# Altium PCB УШЯИ.467444.130_R1.PcbDoc (part 3 of 4)
Units mm, origin at the board's own origin, x right, y up, seen from the top; angles counter-clockwise.
Board outline 280 x 190 mm, 6 copper layers (Top, GND, INT1, INT2, +3.3VB, POWER, Bottom), stack 1.422 mm thick; 240 components, 189 nets, 1128 pads, 331 vias.
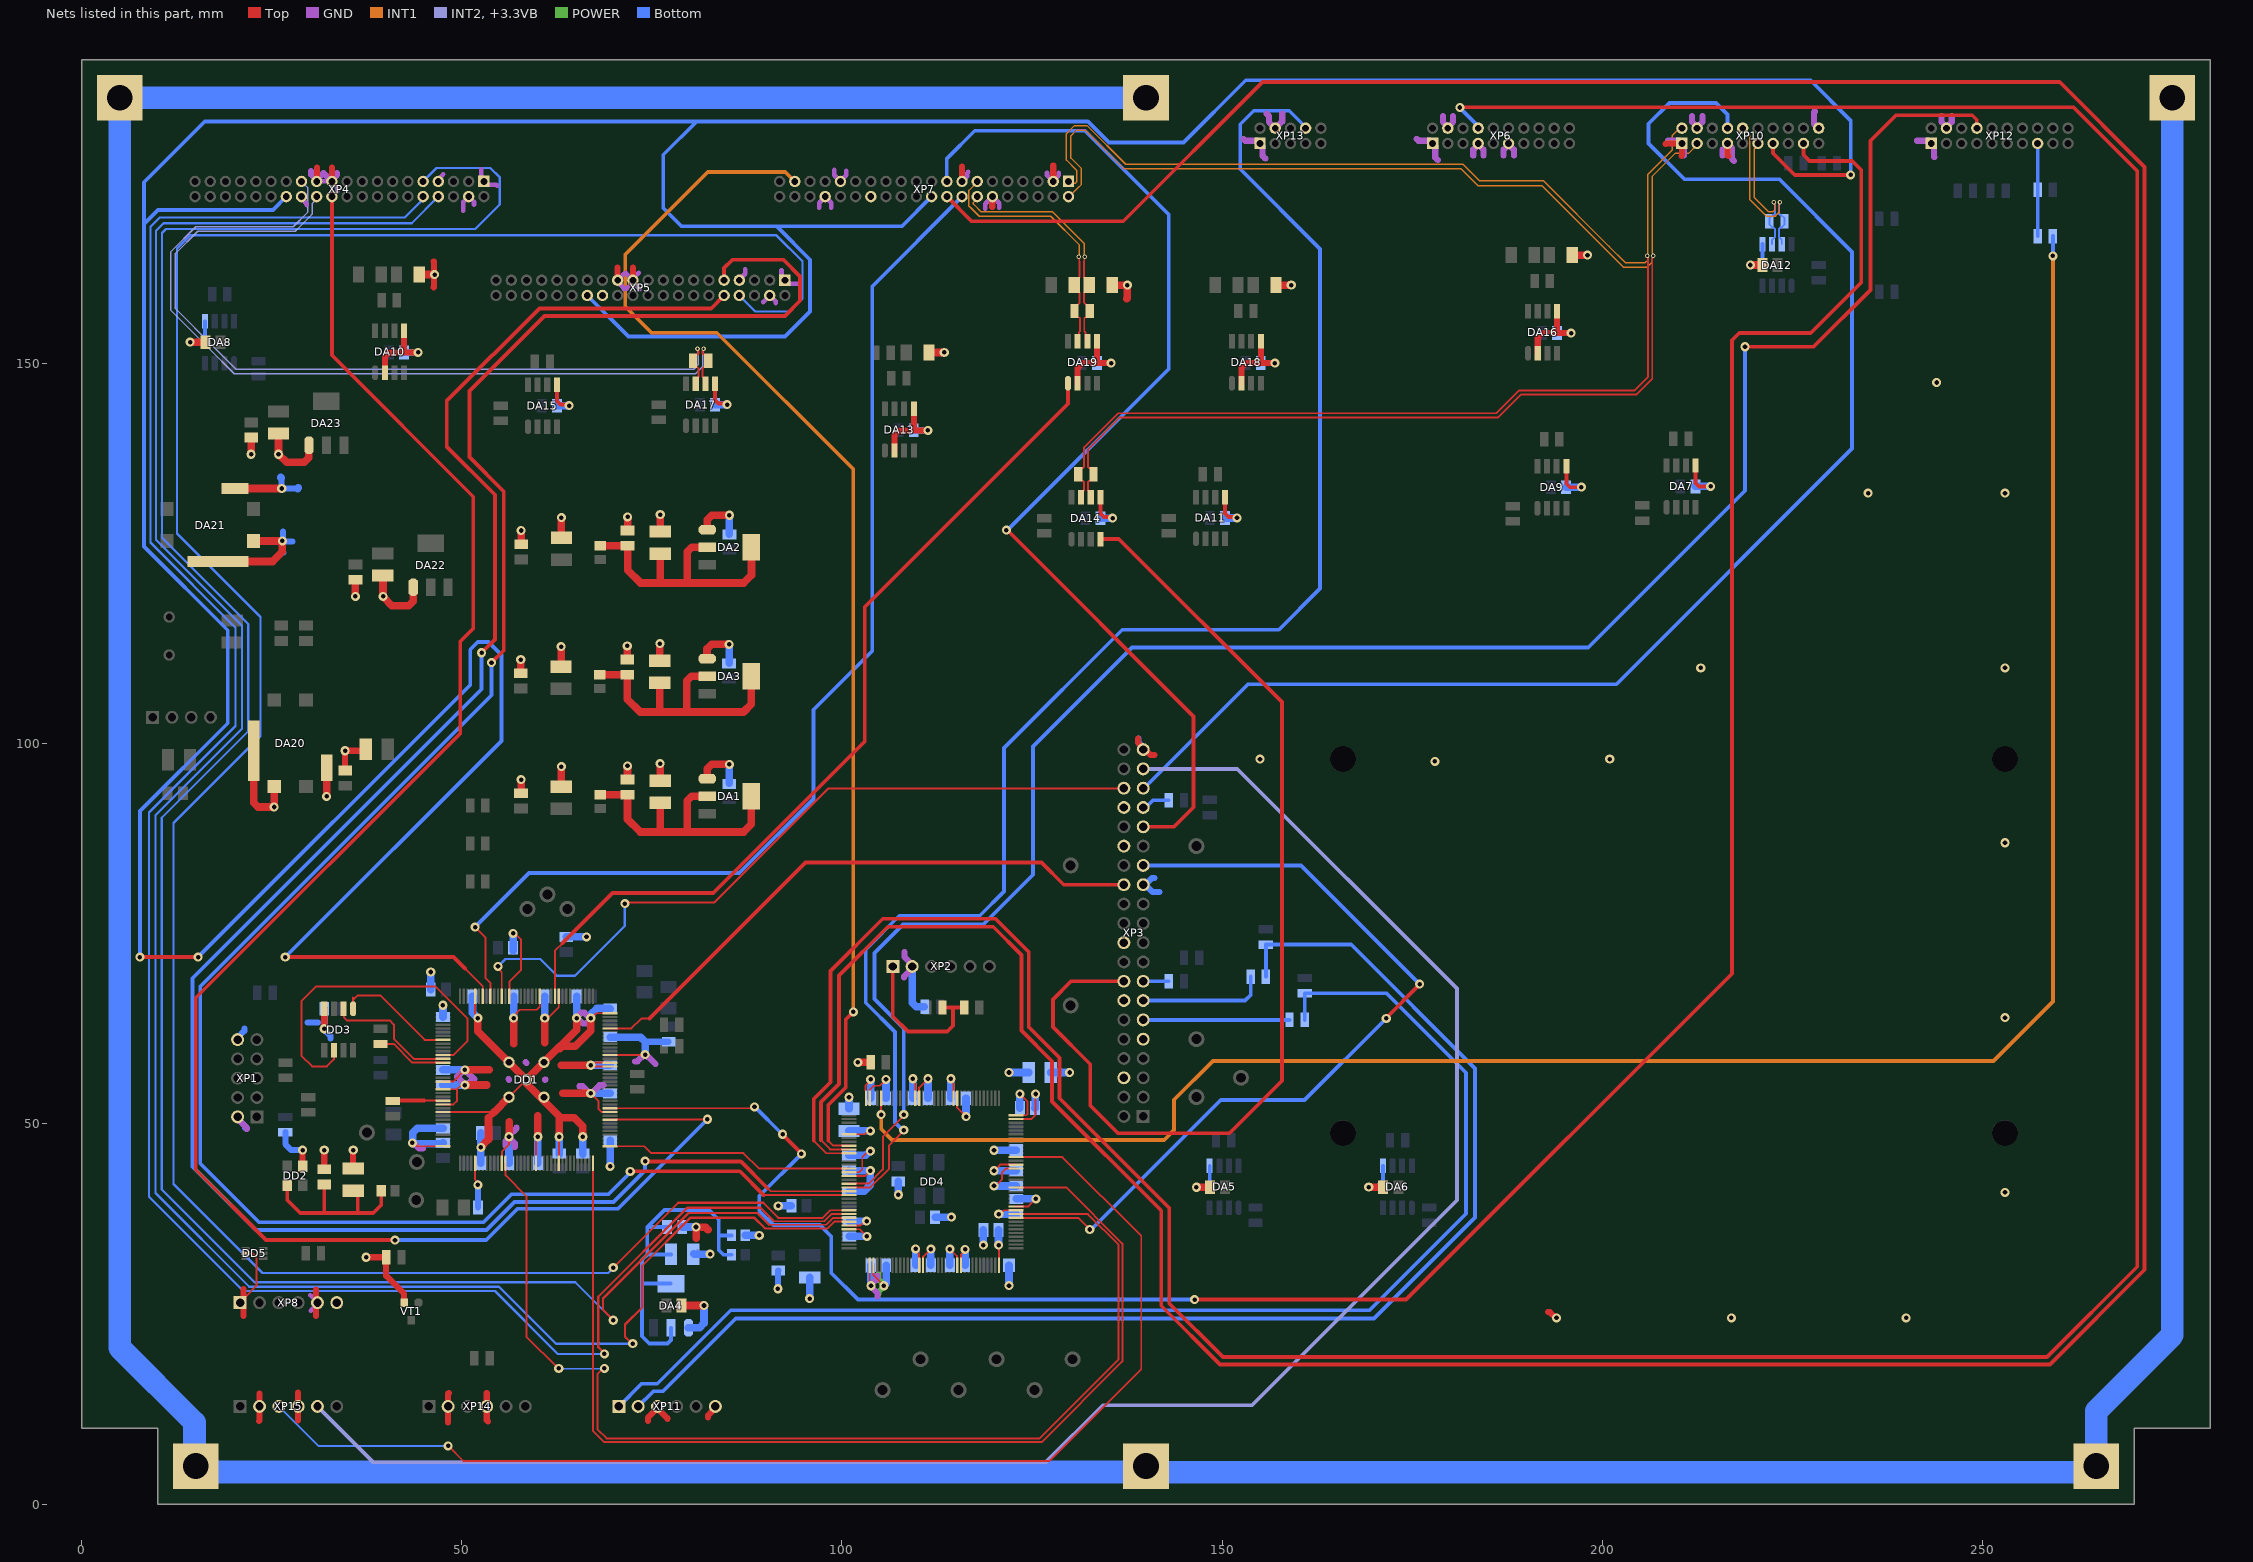
[diagram p7: the nets of this part, all layers, seen from the top]

## Via types
v1: diameter 1.2, hole 0.6, Top to Bottom, tented both sides, 289 vias
v2: diameter 0.6, hole 0.3, Top to Bottom, tented both sides, 42 vias

## Nets (pads, with @x,y where several pads share a name; then routed paths per layer and width w, separated by ;. In a path a pad name is that pad's centre, name@x,y a point inside that pad or via, vN(x,y) a via of type N, cw(c..) or ccw(c..) an arc to the next point about the centre after c; other vN are vias at no path point) (continued)
DAT_DDAC_n: DA14.7 R39.1 XP7.1 XP10.2 | length 213.7
  Top w0.25: DA14.7@131.465,132.45 131.465,133 131.825,133.36 131.825,133.9 131.825,134.479 131.679,134.625 131.525,134.625 131.1,135.05 R39.1@131.1,135.45 131.1,135.85 131.525,136.275 131.679,136.275 131.825,136.421 131.825,138.978 136.347,143.5 186.1,143.5 189.1,146.5 204.272,146.5 206.05,148.278 206.05,163.904 205.992,163.962 205.992,164.158 v2(205.925,164.225)
  INT1 w0.2: XP7.1@129.8,174 130.019,173.781 130.733,173.781 130.9,173.949 130.9,175.441 129.525,176.816 129.525,180.266 130.609,181.35 132.243,181.35 137.343,176.25 181.71,176.25 183.903,174.057 192.318,174.057 192.494,173.881 200.926,165.449 203.075,163.3 205.651,163.3 206.025,163.674 206.025,163.908 206.002,163.931 206.002,164.148 v2(205.925,164.225) 206.002,164.302 206.002,164.519 206.025,164.542 206.025,174.949 209.225,178.149 209.225,180.025 210.2,181 XP10.2@210.5,181
DAT_DDAC_p: DA14.6 R39.2 XP7.2 XP10.3 | length 214.6
  Top w0.25: DA14.6@132.735,132.45 132.735,133 132.375,133.36 132.375,134.127 132.375,134.479 132.521,134.625 132.675,134.625 133.1,135.05 R39.2@133.1,135.45 133.1,135.85 132.675,136.275 132.521,136.275 132.375,136.421 132.375,138.75 136.575,142.95 186.328,142.95 189.328,145.95 204.5,145.95 206.6,148.05 206.6,163.904 206.658,163.962 206.658,164.158 v2(206.725,164.225)
  INT1 w0.2: XP7.2@129.8,172 129.9,172 131,173.1 131.5,173.6 131.5,175.689 130.125,177.064 130.125,180.018 130.857,180.75 131.994,180.75 137.094,175.65 181.462,175.65 183.654,173.457 192.069,173.457 202.826,162.7 205.9,162.7 206.625,163.425 206.625,163.908 206.648,163.931 206.648,164.148 v2(206.725,164.225) 206.648,164.302 206.648,164.519 206.625,164.542 206.625,174.701 209.599,177.675 211.35,177.675 212.5,178.825 XP10.3@212.5,179
DAT_RG: DD1.49 DD4.82 | length 147.4
  Top w0.25: DD1.49@55.75,44.837 55.75,43.25 58.5,40.5 58.5,22.025 62.675,17.85 v1(62.75,17.85) ; v1(68.75,17.85) 68.575,17.85 67.825,17.1 67.825,9.868 69.043,8.65 126,8.65 136.4,19.05 136.4,34.1 132.35,38.15 DD4.82@122.9,38.15
  Bottom w0.25: 63.35,17.8 68.7,17.8 v1(68.75,17.85)
DATAO: DD1.13 DD3.2 | length 17.5
  Top w0.25: DD3.2@34.435,65.175 34.499,65.111 34.499,63.996 34.87,63.625 40.5,63.625 41.05,63.075 41.05,61.225 43.7,58.575 45.95,58.575 DD1.13@47.512,58.575
DCLK: DD1.12 DD3.6 | length 44.6
  Top w0.25: DD3.6@33.165,59.375 33.165,58.49 32.25,57.575 30.31,57.575 28.9,58.985 28.9,66.175 30.825,68.1 46.525,68.1 50.75,63.875 50.75,60.975 48.85,59.075 DD1.12@47.512,59.075
DOOR: R67.2 R68.1 XP12.15 | length 12.2
  Bottom w0.5: R68.1@257.3,166.8 R67.2@257.3,172.9 257.3,173 XP12.15@257.3,179
DOOR_R: DD4.140 R68.2 | length 269.4
  Top w0.25: v1(105.162,51.225) DD4.140@105.162,53.388
  INT1 w0.5: v1(105.162,51.225) 105.162,49.338 106.6,47.9 142.4,47.9 143.7,49.2 143.7,53.2 148.8,58.3 251.5,58.3 259.3,66.1 v1(259.3,164.2)
  Bottom w0.5: v1(259.3,164.2) R68.2@259.3,166.8
DT_DDAC: DA14.4 XP3.16 | length 138.4
  Top w0.5: DA14.4@134.005,126.95 136.425,126.95 157.875,105.5 157.875,55.695 150.972,48.792 136.328,48.792 132.675,52.445 132.675,57.87 127.775,62.77 127.775,66.4 130.153,68.778 XP3.16@137.09,68.778
DVCST: C45.2 C46.2 C47.2 C48.2 C49.2 C50.2 C51.2 C52.2 C53.2 C54.2 C55.2 C56.2 C62.+ C95.- DD4.6 DD4.17 DD4.30 DD4.39 DD4.52 DD4.62 DD4.72 DD4.84 DD4.95 DD4.108 DD4.121 DD4.131 DD4.144 L10.2 R12.1 R13.1 R14.1 XP2.1 | length 103.9
  Top w0.25: DD4.30@100.924,36.65 102.446,36.65 103.021,37.225 v1(103.25,37.225) ; DD4.17@100.924,43.15 103.025,43.15 v1(103.75,43.875) ; DD4.6@100.924,48.65 103.03,48.65 103.48,49.1 v1(103.737,49.1) ; DD4.144@103.162,53.388 103.137,53.413 103.137,54.386 103.125,54.398 103.125,55.072 103.775,55.722 v1(103.775,55.875) ; DD4.39@104.162,31.412 104.162,30.088 v1@105.703,28.547 ; v1(109.325,55.95) 109.325,55.693 109.662,55.356 DD4.131@109.662,53.388 ; DD4.52@110.662,31.412 110.687,31.437 110.687,32.547 111.001,32.861 111.011,32.861 v1(111.7,33.55) ; v1(114.325,55.95) 114.325,55.693 114.662,55.356 DD4.121@114.662,53.388 ; DD4.62@115.662,31.412 115.662,32.787 116.2,33.325 v1(116.2,33.5) ; v1(120,43.85) 120.8,44.65 DD4.95@122.9,44.65 ; v1(120.6,34.075) 120.637,34.038 120.637,31.437 DD4.72@120.662,31.412 ; DD4.84@122.9,39.15 124.525,39.15 v1(125.525,40.15) ; DD4.108@122.9,51.15 124.279,51.15 124.425,51.296 124.425,52.925 v1(123.4,53.95)
  Top w0.5: XP2.1@106.695,70.725 106.695,64.13 108.675,62.15 113.85,62.15 114.625,62.925 114.625,65.325 ; R13.1@113.225,65.325 114.625,65.325 ; R12.1@115.6,65.325 114.625,65.325
  POWER w0.8: 104.81,27.639 104.81,27.901 105.525,28.617 v1(105.525,28.725) 105.525,28.833 104.81,29.549 104.81,30.18
  Bottom w1: L10.2@87.275,35.35 v1(89.125,35.35) ; C95.-@100.925,49.1 v1(103.737,49.1) ; C56.2@100.944,43.894 100.962,43.875 v1(103.75,43.875) 103.75,41.975 102.95,41.175 R14.1@100.95,41.175 ; C55.2@100.95,37.225 v1(103.25,37.225) ; v1(103.775,55.875) 103.788,55.862 103.788,53.387 C45.2@103.8,53.375 ; v1(105.525,28.725) 105.825,29.025 C54.2@105.825,31.425 ; C46.2@109.325,53.375 v1(109.325,55.95) ; C53.2@111.7,31.425 v1(111.7,33.55) ; C47.2@114.325,53.375 v1(114.325,55.95) ; C52.2@116.2,31.425 v1(116.2,33.5) ; v1(120,43.85) 120.012,43.838 122.913,43.838 C49.2@122.925,43.825 ; v1(120.6,34.075) C51.2@120.6,36.05 ; v1(121.975,56.775) C62.+@124.575,56.775 ; C50.2@122.925,40.15 v1(125.525,40.15) ; C48.2@123.4,52.1 v1(123.4,53.95)
EA: R51.2 R53.2 XP11.1 | length 169.6
  Bottom w0.5: XP11.1@70.65,12.85 73.625,15.825 75.695,15.825 85.37,25.5 169.4,25.5 182.1,38.2 182.1,56.75 171.65,67.2 R51.2@160.875,67.2 R53.2@160.875,63.696
EB: R52.2 R54.2 XP11.2 | length 178.5
  Bottom w0.5: XP11.2@73.19,12.85 75.19,14.85 76.475,14.85 86.025,24.4 169.997,24.4 183.3,37.703 183.3,57.3 167,73.6 R52.2@155.775,73.6 R54.2@155.775,69.4
EIMP: DD1.83 XP10.17 | length 319.3
  Top w0.25: DD1.83@69.488,52.075 88.325,52.075 v1(88.5,52.25)
  Top w0.5: v1(92.2,48.65) 92.2,48.6 94.675,46.125 v1(94.675,46.075) ; v1(146.4,26.9) 174.225,26.9 217.1,69.775 217.1,153.1 218.05,154.05 227.45,154.05 234.1,160.7 234.1,175.5 232.9,176.7 227.3,176.7 226.5,177.5 XP10.17@226.5,179
  Bottom w0.5: v1(88.5,52.25) 88.55,52.25 92.15,48.65 v1(92.2,48.65) ; v1(94.675,46.075) 89.125,40.525 89.125,38.575 91,36.7 97.1,36.7 98.6,35.2 98.6,30.4 102.1,26.9 v1(146.4,26.9)
EN_DDA1: XP3.31 XP7.17 | length 143.2
  Top w0.5: v1(121.625,128.125) 121.75,128.125 146.25,103.625 146.25,91.675 143.673,89.098 XP3.31@139.63,89.098
  Bottom w0.5: XP7.17@113.8,174 113.8,177 117.467,180.667 131.963,180.667 143,169.63 143,149.325 121.8,128.125 v1(121.625,128.125)
EN_DDA2: XP3.35 XP10.8 | length 186.8
  Bottom w0.5: XP3.35@139.63,94.178 139.728,94.178 153.4,107.85 153.9,107.85 201.875,107.85 232.875,138.85 232.875,164.725 223.325,174.275 210.825,174.275 206.125,178.975 206.125,181.575 208.875,184.325 214.975,184.325 216.5,182.8 XP10.8@216.5,181
ENB_PC: DD4.81 XP3.27 | length 110
  Top w0.25: DD4.81@122.9,37.65 131.1,37.65 132.6,36.15 v1(132.6,36.125)
  Top w0.5: v1(171.6,63.9) 171.6,63.95 176,68.35 v1(176,68.4)
  Bottom w0.5: v1(132.6,36.125) 132.789,36.125 133.139,36.475 133.15,36.475 149.825,53.15 160.85,53.15 v1(171.6,63.9) ; XP3.27@139.63,84.018 160.382,84.018 v1(176,68.4)
END1B: DD4.29 XP4.8 | length 288.4
  Top w0.25: 89.875,36.275 98.125,36.275 99,37.15 DD4.29@100.924,37.15
  Top w0.3: v1(72.475,21.1) 72.4,21.1 71.475,22.025 71.475,23.625 73.725,25.875 73.725,31.35 80.025,37.65 88.5,37.65 89.875,36.275
  Bottom w0.3: XP4.8@46.9,172 43.4,168.5 10.75,168.5 9.75,167.5 9.75,126.863 21.075,115.538 21.075,101.998 9.7,90.623 9.7,40.925 22.025,28.6 54.872,28.6 62.372,21.1 v1(72.475,21.1)
END1P: DD4.26 XP5.8 | length 330.3
  Top w0.25: 91.65,37.675 91.675,37.65 97.45,37.65 98.45,38.65 DD4.26@100.924,38.65
  Top w0.3: v1(69.914,31.1) 78.464,39.65 89.65,39.65 91.625,37.675 91.65,37.675
  Bottom w0.3: v1(69.914,31.1) 69.914,31.064 69.25,30.4 23.776,30.4 12.075,42.101 12.075,89.614 23.5,101.039 23.5,116.707 12.525,127.682 12.525,165.175 14.25,166.9 91.4,166.9 94.8,163.5 94.8,158.6 93.1,156.9 88.6,156.9 XP5.8@86.5,159
END2B: DD4.28 XP4.9 | length 304.6
  Top w0.25: 90.4,36.75 97.95,36.75 98.85,37.65 DD4.28@100.924,37.65
  Top w0.3: v1@70.033,24.092 68.575,25.55 68.575,27.05 79.825,38.3 88.85,38.3 90.4,36.75
  Bottom w0.3: XP4.9@44.9,174 46.65,175.75 53.75,175.75 55,174.5 55,171 51.75,167.75 11.075,167.75 10.55,167.225 10.55,127.129 21.9,115.779 21.9,101.656 10.525,90.281 10.525,41.375 22.725,29.175 64.914,29.175 v1(69.914,24.175) ; v1@69.722,24.003 v1@70.021,23.704
END2P: DD4.22 XP5.9 | length 277.3
  Top w0.25: 89.693,40.65 DD4.22@100.924,40.65
  Top w0.5: v1(53.9,110.7) 55.5,112.3 55.5,133.225 51,137.725 51,146.438 60.862,156.3 92.5,156.3 94.5,158.3 94.5,161.5 92.3,163.7 85.6,163.7 84.5,162.6 XP5.9@84.5,161 ; v1(72.15,43.775) 86.568,43.775 89.693,40.65
  Bottom w0.5: v1(53.9,110.7) 53.9,106.4 15.575,68.075 15.575,44.825 23.325,37.075 52.861,37.075 56.536,40.75 69.299,40.75 72.15,43.601 v1(72.15,43.775)
ENDU: DD4.9 XP7.37 | length 165.7
  Top w0.25: 98.2,47.825 98.875,47.15 DD4.9@100.924,47.15
  Top w0.5: 98.2,47.825 98.2,52.5 100.5,54.8 100.5,63.75 v1(101.5,64.75)
  INT1 w0.5: XP7.37@93.8,174 92.55,175.25 82.349,175.25 71.5,164.401 71.5,157.543 74.943,154.1 83.525,154.1 101.5,136.125 v1(101.5,64.75)
ENRGB: DD4.27 XP4.10 | length 290.2
  Top w0.25: 91.05,37.225 91.075,37.2 97.675,37.2 98.625,38.15 DD4.27@100.924,38.15
  Top w0.3: v1(68.75,19.75) 68.75,19.847 67.95,20.647 67.95,27.272 79.678,39 89.25,39 91.025,37.225 91.05,37.225
  Bottom w0.3: XP4.10@45.065,172.165 45.065,171.84 44.526,171.302 44.526,171.276 42.5,169.25 10.25,169.25 9.025,168.025 9.025,126.498 20.225,115.298 20.225,102.35 8.85,90.975 8.85,40.425 21.25,28.025 54.35,28.025 62.625,19.75 v1(68.75,19.75)
ENRGF: DD4.10 XP7.18 | length 562.7
  Top w0.25: 97.25,47.85 98.45,46.65 DD4.10@100.924,46.65
  Top w0.5: 97.25,47.85 97.25,52.894 99.6,55.244 99.6,69.525 106.025,75.95 119.9,75.95 123.615,72.235 123.615,62.285 127.65,58.25 127.65,52.95 142,38.6 142,26.096 149.721,18.375 258.904,18.375 271.357,30.829 271.357,175.918 260.2,187.075 155.325,187.075 137,168.75 117.05,168.75 XP7.18@113.8,172
ENRGI: DD4.11 XP6.8 | length 488.8
  Top w0.25: 96.293,47.807 97.95,46.15 DD4.11@100.924,46.15
  Top w0.5: 96.293,47.807 96.293,53.29 98.5,55.497 98.5,70.125 105.375,77 120.204,77 124.572,72.631 124.572,62.753 128.607,58.718 128.607,53.393 143.057,38.943 143.057,26.393 150.118,19.332 258.507,19.332 270.4,31.225 270.4,175.35 262,183.75 181.325,183.75 v1(181.3,183.725)
  Bottom w0.5: v1@181.3,183.675 183.277,181.698 183.277,181.694 183.7,181.271 XP6.8@183.7,181
ENRGK: DD4.19 XP12.8 | length 261
  Top w0.25: DD4.19@100.924,42.15 103.525,42.15 105.4,44.025 105.4,48.35 108.125,51.075 v1(108.125,51.225)
  Top w0.5: v1(218.8,152.25) 227.825,152.25 235.3,159.725 235.3,179.35 238.65,182.7 248.7,182.7 249.289,182.111 249.289,181.011 XP12.8@249.3,181
  Bottom w0.5: v1(108.125,51.225) 108.125,62.576 104.275,66.426 104.275,72.5 108.025,76.25 118.6,76.25 125.15,82.8 125.15,99.675 138.15,112.675 198.175,112.675 218.8,133.3 v1(218.8,152.25)
ENRGP: DD4.21 XP5.10 | length 258
  Top w0.25: 90.226,41.549 90.625,41.15 DD4.21@100.924,41.15
  Top w0.5: v1(52.6,112) 54.35,113.75 54.35,132.775 48,139.125 48,145.1 60.2,157.3 82.8,157.3 XP5.10@84.5,159 ; v1(74.1,45.125) 74.15,45.075 86.7,45.075 90.226,41.549
  Bottom w0.5: v1(52.6,112) 52.6,107.2 14.575,69.175 14.575,44.411 22.911,36.075 53.25,36.075 56.925,39.75 69.95,39.75 74.1,43.9 v1(74.1,45.125)
ENRGV: DD4.20 XP13.8 | length 204.5
  Top w0.25: DD4.20@100.924,41.65 103.732,41.65 106.2,44.118 106.2,47.175 108.125,49.1 v1(108.125,49.2)
  Bottom w0.5: v1(108.125,49.2) 107.988,49.2 106.975,50.213 106.975,62.1 103.125,65.95 103.125,72.976 107.549,77.4 118.124,77.4 121.3,80.576 121.3,99.45 136.875,115.025 157.475,115.025 162.9,120.45 162.9,165.125 152.4,175.625 152.4,181.525 154.175,183.3 158.85,183.3 XP13.8@161.15,181
ENS: DD1.136 XP7.16 | length 148.7
  Top w0.25: v1(51.738,75.9) 53.1,74.538 53.1,69.225 53.75,68.575 DD1.136@53.75,66.813
  Bottom w0.5: v1@51.75,75.912 58.838,83 86.5,83 96.25,92.75 96.25,104.5 104,112.25 104,160.2 XP7.16@115.8,172
F_CLK: DD1.24 R2.2 | length 6.6
  Top w0.25: 45,53.075 DD1.24@47.512,53.075
  Top w0.3: R2.2@40.9,53.025 R2.2@40.95,53.075
  Top w0.5: R2.2@40.95,53.075 45,53.075
F_CON1: DD1.104 XP3.26 | length 77.9
  Top w0.25: DD1.104@69.488,62.575 72.3,62.575 73.6,63.875 74.675,63.875
  Top w0.5: 74.675,63.875 95.2,84.4 126.25,84.4 129.172,81.478 XP3.26@137.09,81.478
F_CON2: DD1.73 DD4.15 | length 32.6
  Top w0.25: DD1.73@69.488,47.075 74.025,47.075 74.925,46.175 87.025,46.175 89.05,44.15 DD4.15@100.924,44.15
F_CON3: DD1.72 DD4.89 | length 142.5
  Top w0.25: 67.25,41.6 DD1.72@67.25,44.837 ; 67.25,41.64 67.25,9.621 68.721,8.15 126.279,8.15 136.9,18.771 136.9,34.275 129.525,41.65 DD4.89@122.9,41.65
FIT: XP3.37 XP15.5 | length 248.3
  INT2, +3.3VB w0.5: XP15.5@31,12.85 38.361,5.489 126.801,5.489 134.312,13 153.925,13 180.9,39.975 180.9,67.825 152.007,96.718 XP3.37@139.63,96.718
FULL: DD1.133 XP3.36 | length 99.5
  Top w0.25: v1(54.75,70.725) 54.75,70.468 55.25,69.968 DD1.133@55.25,66.813
  Top w0.3: v1(71.446,79) 71.571,79.125 83.2,79.125 98.2,94.125 XP3.36@136.904,94.125
  Bottom w0.3: v1(54.75,70.725) 55.725,71.7 60.3,71.7 62.5,69.5 64.875,69.5 71.446,76.071 v1(71.446,79)
GND: C1.1 C2.- C3.1 C4.1 C5.1 C6.1 C7.1 C8.1 C9.1 C10.1 C11.- C12.1 C14.1 C15.1 C16.- C17.1 C18.1 C19.1 C20.1 C21.1 C22.1 C23.1 C24.1 C25.1 C26.- C27.1 C28.- C29.1 C30.- C31.1 C32.1 C33.1 C34.1 C35.1 C36.1 C37.1 C38.1 C39.1 C40.- C41.1 C42.1 C43.1 C44.1 C45.1 C46.1 C47.1 C48.1 C49.1 C50.1 C51.1 C52.1 C53.1 C54.1 C55.1 C56.1 C57.1 C58.2 C59.- C60.2 C61.2 C62.- C63.1 C64.- C65.1 C66.- C67.- C68.1 C69.1 C70.1 C71.1 C72.1 C73.1 C74.1 C75.1 C76.1 C77.1 C78.1 C79.1 C80.1 C81.1 C90.2 C91.- C92.1 C93.- C94.1 C95.+ C96.- C97.1 DA1.1 DA2.1 DA3.1 DA4.1 DA5.5 DA6.5 DA7.5 DA8.5 DA9.5 DA10.2 DA10.5 DA11.5 DA12.5 DA13.2 DA13.5 DA14.5 DA15.5 DA16.2 DA16.5 DA17.5 DA18.2 DA18.5 DA19.2 DA19.5 DA20.4 DA21.4 DA22.1 DA23.1 DD1.19 DD1.21 DD1.25 DD1.27 DD1.36 DD1.41 DD1.48 DD1.57 DD1.63 DD1.82 DD1.94 DD1.95 DD1.97 DD1.108 DD1.118 DD1.123 DD1.131 DD1.140 DD1.145 DD2.2 DD3.4 DD4.16 DD4.31 DD4.38 DD4.51 DD4.61 DD4.83 DD4.94 DD4.107 DD4.120 DD4.130 DD4.143 DD5.2 pad.0 R7.2 R10.1 R11.1 R27.2 R34.2 R41.2 R48.2 R49.2 R61.1 VT1.S XP1.2 XP1.10 XP2.2 XP3.6 XP3.9 XP3.14 XP3.20 XP3.25 XP3.30 XP3.34 XP3.39 XP4.1 XP4.4 XP4.7 XP4.21 XP4.23 XP4.26 XP5.1 XP5.4 XP5.7 XP5.21 XP5.23 XP5.26 XP6.1 XP6.4 XP6.7 XP6.11 XP7.3 XP7.12 XP7.15 XP7.28 XP7.31 XP7.34 XP8.1 XP8.5 XP8.6 XP10.1 XP10.4 XP10.7 XP10.20 XP11.3 XP11.6 XP12.1 XP12.4 XP13.1 XP13.4 XP14.2 XP14.4 XP15.2 XP15.4 | length 1578.4
  Top w0.25: XP8.1@20.84,26.5 21.29,26.95 21.565,27.225 21.565,27.29 22.975,28.7 22.975,32.475 22.475,32.975 DD5.2@21.55,32.975 ; v1(43.5,47.525) 43.671,47.525 44.121,47.075 DD1.36@47.512,47.075 ; DD1.27@47.512,51.575 54.235,51.575 ; DD1.25@47.512,52.575 48.9,52.575 49.35,53.025 49.35,54.557 ; DD1.21@47.512,54.575 49.332,54.575 49.35,54.557 ; DD1.19@47.537,55.55 DD1.19@47.512,55.575 48.85,55.575 v1(50.4,57.125) ; v1@50.75,55.125 v1(50.4,55.125) 49.918,55.125 49.35,54.557 ; DD1.41@51.75,44.837 51.75,42.675 51.918,42.507 51.918,42.439 51.981,42.376 52.049,42.376 52.049,41.6 v1@52.1,41.549 ; DD1.140@51.75,66.813 51.75,64.532 52.1,64.182 v1(52.1,63.925) ; 53.5,50.84 53.993,51.332 ; DD1.48@55.25,44.837 55.275,44.862 55.275,46.339 56.2,47.264 v1(56.2,48.325) v1@56.2,48.525 ; DD1.145@56.193,53.532 DD1.145@58.485,55.825 ; DD1.131@56.25,66.813 56.25,68.725 57.8,70.275 57.8,74.225 56.95,75.075 v1(56.75,75.075) ; v1(56.8,63.925) 56.8,64.182 57.643,65.025 59.85,65.025 60.25,65.425 DD1.123@60.25,66.813 ; DD1.57@59.75,44.837 59.75,48.018 60,48.268 v1(60,48.325) ; v1(60.9,63.925) 61.082,64.107 61.475,64.107 62.75,65.382 DD1.118@62.75,66.813 ; DD1.63@62.75,44.837 62.775,44.862 62.775,48.3 v1(62.8,48.325) ; v1@64.918,64.107 v1(65.1,63.925) ; v1(66.95,54.025) 68,52.975 68,51.953 68.353,51.6 69.463,51.6 DD1.82@69.488,51.575 ; v1(66.95,63.925) 67.029,63.925 67.679,64.575 DD1.108@69.488,64.575 ; DD1.94@69.488,57.575 67.1,57.575 v1(66.95,57.725) 67.207,57.725 67.557,58.075 DD1.95@69.488,58.075 ; DD1.97@69.488,59.075 74.05,59.075 v1(74.1,59.125) ; DD4.31@100.924,36.15 102.35,36.15 v1(103.275,35.225) ; DD4.16@100.924,43.65 102.25,43.65 102.675,44.075 102.675,45.625 102.94,45.89 102.958,45.89 103.493,46.425 v1(103.75,46.425) ; DD4.38@103.662,31.412 103.662,28.988 v1@103.9,28.75 ; DD4.143@103.662,53.388 103.687,53.413 103.687,54.523 104.193,55.028 104.953,55.028 v1(105.8,55.875) ; v1(109.7,33.575) 109.7,33.318 110.162,32.856 DD4.51@110.162,31.412 ; DD4.130@110.162,53.388 110.162,54.787 v1(111.325,55.95) ; v1(114.2,33.55) 115.137,32.613 115.137,31.437 DD4.61@115.162,31.412 ; DD4.120@115.162,53.388 115.162,52.138 v1(116.325,50.975) ; v1(120,41.85) 120.225,41.85 121.05,42.675 121.05,43.6 121.575,44.125 122.875,44.125 DD4.94@122.9,44.15 ; v1(120.625,38.15) 120.882,38.15 121.382,38.65 DD4.83@122.9,38.65 ; DD4.107@122.9,50.65 124.925,50.65 125.475,51.2 v1(125.475,53.95)
  Top w0.5: DA15.5@62.505,147.25 62.505,145.095 62.966,144.634 63.966,144.634 v1(64.1,144.5) ; DA17.5@83.305,147.384 83.305,145.229 83.766,144.768 84.766,144.768 v1(84.9,144.634) ; DA14.5@134.005,132.45 134.005,130.295 134.466,129.834 135.466,129.834 v1(135.6,129.7) ; DA11.5@150.38,132.475 150.38,130.32 150.841,129.859 151.841,129.859 v1(151.975,129.725) ; DA9.5@195.299,136.525 195.299,134.225 195.748,133.775 v1(197.275,133.775) ; DA7.5@212.299,136.625 212.299,134.325 212.748,133.875 v1(214.275,133.875)
  Top w0.8: XP8.1@20.84,26.5 21.29,26.05 21.29,24.76 ; XP8.1@21.29,26.95 21.29,28.29 ; 23.3,10.925 23.38,11.005 XP15.2@23.38,12.85 23.38,14.555 ; 28.46,10.985 XP15.4@28.46,12.85 28.46,14.66 ; v1(29.05,46.575) 29.062,46.563 29.062,44.437 DD2.2@29.075,44.425 ; 30.8,28.225 30.828,28.197 30.828,26.672 XP8.5@31,26.5 30.828,26.328 30.828,24.753 ; XP4.23@30.9,174 30.95,174.05 30.95,175.8 ; v1(31.895,46.575) 31.897,46.573 31.897,44.051 C1.1@31.899,44.049 ; v1(31.895,62.531) DD3.4@31.895,65.175 ; XP4.21@32.9,174 32.9,175.825 ; C90.2@34.65,96.5 v1(34.65,99.1) 37.15,99.1 C91.-@37.35,99.3 ; C2.-@35.705,44.125 v1(35.705,46.563) ; v1(37.4,32.475) R61.1@40.05,32.475 40.025,32.45 40.025,30.025 42.401,27.649 42.401,26.501 VT1.S@42.4,26.5 ; DA10.2@39.865,148.85 39.865,150.915 40.45,151.5 42.35,151.5 ; DA10.5@42.405,154.35 42.405,151.555 42.35,151.5 ; v1(44.25,151.5) 42.35,151.5 ; 46.3,160.075 46.35,160.125 46.35,161.695 v1(46.405,161.75) 46.35,161.805 46.35,163.425 46.3,163.475 ; 48.15,10.75 48.19,10.79 XP14.2@48.19,12.85 48.19,14.515 48.3,14.625 ; 53.25,14.625 53.27,14.605 XP14.4@53.27,12.85 53.27,11.03 53.425,10.875 ; v1@63.992,144.5 v1(64.1,144.5) ; XP5.23@70.5,161 70.5,162.672 ; XP5.21@72.5,161 72.5,162.672 ; 74.475,10.95 74.475,11.351 XP11.3@75.73,12.606 ; XP11.3@75.73,12.85 XP11.3@75.73,12.606 ; 77.025,11.225 77.025,11.311 XP11.3@75.73,12.606 ; 82.4,11.4 82.4,11.656 83.35,12.606 XP11.6@83.35,12.85 ; v1@84.792,144.634 v1(84.9,144.634) ; DA13.2@106.915,138.597 106.915,140.662 107.5,141.247 109.4,141.247 ; DA13.5@109.455,144.097 109.455,141.302 109.4,141.247 ; v1(111.3,141.247) 109.4,141.247 ; XP7.15@115.8,174 115.8,175.975 ; 119.775,170.625 119.775,171.975 XP7.12@119.8,172 ; XP7.3@127.8,174 127.8,176.075 ; DA19.2@131.015,147.45 131.015,149.515 131.6,150.1 133.5,150.1 ; DA19.5@133.555,152.95 133.555,150.155 133.5,150.1 ; v1(135.4,150.1) 133.5,150.1 ; 138.95,100.7 138.95,100.182 139.63,99.502 XP3.39@139.63,99.258 139.874,99.258 140.607,98.525 141.1,98.525 ; DA18.2@152.565,147.45 152.565,149.515 153.15,150.1 155.05,150.1 ; DA18.5@155.105,152.95 155.105,150.155 155.05,150.1 ; v1(156.95,150.1) 155.05,150.1 ; DA16.2@191.54,151.4 191.54,153.465 192.125,154.05 194.025,154.05 ; 192.875,25.25 193.142,25.25 193.892,24.5 v1(194,24.5) ; DA16.5@194.08,156.9 194.08,154.105 194.025,154.05 ; v1(195.925,154.05) 194.025,154.05 ; 208.375,178.925 208.45,179 XP10.1@210.5,179 210.5,177.4 210.45,177.35 ; XP10.7@216.5,179 216.5,177.446 216.625,177.321
  Top w1: v1(14.25,152.85) C69.1@16.25,152.85 ; DA21.4@17.903,124 25.1,124 26.362,125.262 26.362,126.662 v1(26.4,126.7) DA21.4@22.603,126.7 ; DA21.4@20.153,133.6 v1(26.3,133.6) ; v1(22.275,138.114) C97.1@22.275,140.3 ; DA20.4@22.6,99.1 22.6,92.286 23.186,91.7 v1(25.3,91.7) DA20.4@25.3,94.4 ; C96.-@25.875,140.85 v1(25.875,138.114) 26.939,137.05 29.289,137.05 29.875,137.636 DA23.1@29.875,139.3 ; v1(32.2,93.1) DA20.4@32.2,96.5 ; v1(36,119.414) C92.1@36,121.6 ; C93.-@39.6,122.15 39.619,122.131 39.619,119.433 v1(39.638,119.414) 39.638,119.36 40.798,118.2 43.014,118.2 43.6,118.786 DA22.1@43.6,120.6 ; R27.2@44.4,161.75 v1(46.405,161.75) ; v1(50.4,57.125) 53.618,57.125 ; v1@50.75,55.125 53.3,55.125 ; v1(52.1,63.925) 52.1,62.21 DD1.145@58.485,55.825 ; v1(52.5,46.913) 52.5,46.967 53.5,47.967 53.5,50.84 ; 53.993,51.332 54.235,51.575 DD1.145@56.193,53.532 ; v1(56.2,48.325) 56.238,48.363 56.238,50.263 ; 56.8,60.575 v1(56.8,63.925) ; C29.1@57.75,109.3 v1(57.75,111.1) ; C39.1@57.79,93.516 v1(57.79,95.316) ; C15.1@57.8,126.275 v1(57.8,128.075) ; v1(60,48.325) 60,51.075 ; 60.9,60.675 v1(60.9,63.925) ; v1(62.8,48.325) 62.8,51.025 ; 62.9,59.889 63.25,60.239 64.914,60.239 66.95,62.275 v1(66.95,63.925) ; C30.-@63.05,110.15 v1(63.05,112.8) ; 63.082,57.725 v1(66.95,57.725) ; C40.-@63.09,94.366 v1(63.09,97.016) ; C16.-@63.1,127.125 v1(63.1,129.775) ; 63.25,54.025 v1(66.95,54.025) ; v1(65.1,63.925) 65.1,62.425 DD1.145@60.8,58.125 DD1.145@58.5,55.825 58.25,55.575 62.8,51.025 ; v1(65.9,48.325) 65.9,49.725 64.785,50.84 62.985,50.84 62.8,51.025 ; C27.1@71.75,111.1 v1(71.75,112.9) ; C25.1@71.79,95.316 v1(71.79,97.116) ; C10.1@71.8,128.075 v1(71.8,129.875) ; C28.-@76.05,110.95 v1(76.05,113.2) ; C26.-@76.09,95.166 v1(76.09,97.416) ; C11.-@76.1,127.925 v1(76.1,130.175) ; C58.2@78.9,26.125 v1(81.85,26.125) ; v1(80.8,36.45) v1@80.81,36.44 ; 80.81,35 v1@80.81,36.44 ; DA3.1@82.25,111.2 82.25,112.5 82.85,113.1 v1(85.15,113.1) ; DA1.1@82.29,95.416 82.29,96.716 82.89,97.316 v1(85.19,97.316) ; DA2.1@82.3,128.175 82.3,129.475 82.9,130.075 v1(85.2,130.075) ; 82.375,36.1 82.063,36.412 80.838,36.412 v1@80.81,36.44 ; v1(102.1,58.1) R10.1@103.775,58.1 ; R34.2@111.45,151.497 v1(113.455,151.497) ; R49.2@135.55,160.35 v1(137.555,160.35) 137.517,160.312 137.517,158.617 137.475,158.575 ; v1(146.625,41.675) 148.375,41.675 C65.1@148.4,41.7 ; R48.2@157.1,160.35 v1(159.105,160.35) ; v1(169.3,41.7) 171.05,41.7 171.2,41.85 C68.1@171.2,42.1 ; R41.2@196.075,164.3 v1(198.08,164.3) ; v1(219.5,163) C74.1@221.095,163
  GND w0.6: XP4.26@28.9,172 28.9,171.756 29.6,171.056 29.6,170.875 ; 30.05,27.5 31,26.55 XP8.5@31,26.5 31,26.286 30.125,25.411 ; XP4.23@30.9,174 XP4.21@32.9,174 32.9,173.756 33.592,173.064 33.592,172.651 ; XP4.7@46.9,174 46.9,174.244 47.572,174.916 47.572,174.95 ; 50.2,170.125 50.2,171.3 XP4.4@50.9,172 51.6,171.3 51.6,170.949 ; 52.525,175.6 52.525,174.375 XP4.1@52.9,174 53.35,173.55 54.527,173.55 54.65,173.427 ; 71.275,159.84 71.275,159.981 70.5,160.756 XP5.23@70.5,161 70.5,161.05 71.275,161.825 ; 71.55,161.98 71.55,161.95 XP5.21@72.5,161 ; 71.725,159.901 71.725,159.981 XP5.21@72.5,160.756 ; 73.25,161.997 73.25,161.994 72.5,161.244 XP5.21@72.5,161 ; 73.425,159.831 XP5.21@72.5,160.756 ; XP5.7@86.5,161 86.5,161.038 87.3,161.838 87.3,162.45 ; 89.674,158.075 89.674,158.174 XP5.4@90.5,159 91.3,158.2 91.3,158.006 ; 92.051,162.325 92.051,161.449 XP5.1@92.5,161 92.944,160.556 94.125,160.556 ; 97,170.55 97,171.199 97.8,171.999 XP7.34@97.8,172 97.8,171.974 98.575,171.199 98.575,170.525 ; 99,175.504 99,174.801 99.8,174.001 XP7.31@99.8,174 99.8,174.051 100.55,174.801 100.55,175.375 ; XP7.15@115.8,174 116.475,174.675 116.475,175.085 116.64,175.25 ; 118.85,170.4 118.85,171.05 XP7.12@119.8,172 120.675,171.125 120.675,170.519 ; 126.975,175.16 126.975,174.825 XP7.3@127.8,174 127.8,174.051 128.55,174.801 128.55,175.127 ; XP5.21@72.5,160.756 XP5.21@72.5,161
  GND w0.8: XP1.2@20.5,50.941 20.5,50.697 21.7,49.497 21.7,49.325 ; 30.175,175.351 30.175,174.914 30.9,174.189 XP4.23@30.9,174.185 ; XP4.23@30.9,174 XP4.23@30.9,174.185 ; 33.55,175.075 33.55,174.839 32.9,174.189 XP4.21@32.9,174 31.825,175.075 31.79,175.075 XP4.23@30.9,174.185 ; v1(43.5,47.525) 43.608,47.525 44.38,46.753 44.9,46.753 ; 49.381,56.214 50.292,57.125 v1(50.4,57.125) 51.632,55.893 ; 49.677,55.956 50.4,55.233 v1(50.4,55.125) 50.508,55.125 50.708,55.325 50.869,55.325 51.164,55.621 ; 55.737,47.207 55.737,47.754 v1@56.2,48.217 ; 56.15,55.893 56.218,55.825 ; 56.958,46.967 56.958,47.459 v1@56.2,48.217 ; 57.2,49.525 57.2,49.433 56.2,48.433 v1(56.2,48.325) v1@56.2,48.217 ; 58.4,58.125 58.5,58.025 ; 60.942,55.825 60.967,55.85 ; 65.5,54.967 65.9,54.967 66.842,54.025 v1(66.95,54.025) 67.058,54.025 68.133,55.1 68.6,55.1 ; 72.8,58.245 73.073,58.245 73.603,58.775 73.642,58.775 73.992,59.125 v1(74.1,59.125) 74.208,59.125 74.558,58.775 74.608,58.775 75.5,57.883 ; 104.7,27.325 104.7,27.742 103.825,28.617 v1(103.825,28.725) 103.825,28.833 104.7,29.708 104.7,30.061 ; 108.175,69.275 108.175,69.421 109.235,70.481 XP2.2@109.235,70.725 109.235,70.969 108.225,71.979 108.225,72.625 ; 152.851,179.55 153.051,179.35 154.65,179.35 XP13.1@155,179 155.35,178.65 155.35,177.35 155.7,177 ; 155.89,182.9 156.162,182.629 156.162,181.819 156.98,181 XP13.4@157,181 157.04,181 157.929,181.889 157.929,182.9 ; 175.6,179.6 175.85,179.35 177.35,179.35 XP6.1@177.7,179 178.05,178.65 178.05,177.15 178.4,176.8 ; 179.05,182.603 179.05,181.819 179.7,181.169 XP6.4@179.7,181.119 ; XP6.4@179.7,181 XP6.4@179.7,181.119 ; 180.4,182.568 180.4,181.819 XP6.4@179.7,181.119 ; 183.05,177.397 183.05,178.181 XP6.7@183.7,178.831 ; XP6.7@183.7,178.881 184.4,178.181 184.4,177.432 ; 187.05,177.397 187.05,178.181 XP6.11@187.7,178.831 ; XP6.11@187.7,178.881 188.4,178.181 188.4,177.432 ; 208.7,179.4 208.75,179.35 210.15,179.35 XP10.1@210.5,179 210.783,178.717 210.783,177.397 ; 211.85,182.603 211.85,181.819 XP10.4@212.5,181.169 ; XP10.4@212.5,181.119 213.2,181.819 213.2,182.568 ; 215.85,177.397 215.85,178.181 XP10.7@216.5,178.831 ; XP10.7@216.5,179 216.5,178.955 217.1,178.355 217.1,176.94 217.34,176.7 ; 227.979,183.2 227.855,183.076 227.855,181.6 228.455,181 XP10.20@228.5,181 ; 241.4,179.367 241.417,179.35 242.95,179.35 XP12.1@243.3,179 243.65,178.65 243.65,177.255 243.7,177.205 ; 244.65,182.603 244.65,181.819 XP12.4@245.3,181.169 ; XP12.4@245.3,181.119 246,181.819 246,182.568 ; v1(65.1,63.925) 65.208,63.925 65.927,63.206 66.339,63.206 66.95,63.817 v1(66.95,63.925) 66.842,63.925 66.107,64.66 65.727,64.66 65.1,64.033 v1(65.1,63.925)
  Bottom w0.25: C59.-@80.431,32.85 80.5,32.919 C59.-@81,33.419
  Bottom w0.5: v1(14.25,152.85) 15.6,152.85 16.226,153.476 DA8.5@16.226,155.6 ; v1(146.625,41.675) 147.9,41.675 148.375,42.15 DA5.5@148.375,44.492 ; v1@169.3,41.65 169.317,41.667 170.242,41.667 171.165,42.59 DA6.5@171.165,44.492 ; v1(219.5,163) 219.634,163.134 220.634,163.134 221.095,163.595 DA12.5@221.095,165.75
  Bottom w0.8: XP1.2@20.5,50.941 20.5,50.697 21.45,49.747 21.45,49.475 ; XP1.10@20.5,61.101 20.5,61.344 21.4,62.244 21.4,62.55 ; v1@26.262,133.638 26.262,134.988 ; v1(26.3,133.6) 28.4,133.6 ; 26.45,127.95 26.45,126.75 v1(26.4,126.7) v1@26.475,126.625 ; 26.525,125.2 26.477,125.248 26.477,126.623 v1@26.475,126.625 ; R7.2@26.773,48.925 26.773,47.352 27.55,46.575 v1(29.05,46.575) ; 27.725,126.625 v1@26.475,126.625 ; 29.675,63.35 29.704,63.379 31.046,63.379 ; v1(31.895,62.531) 31.895,62.422 32.7,61.617 32.7,61.225 ; v1@31.9,62.536 C44.1@31.9,65.175 ; C72.1@42.4,151.5 v1(44.25,151.5) ; C19.1@52.1,39.025 v1(52.1,42) v1@52.1,42.185 ; 74.1,60.825 C38.1@77.2,60.825 ; v1(91.575,28.329) 91.6,28.354 91.6,30.7 C63.1@91.625,30.725 ; C75.1@109.45,141.247 v1(111.3,141.247) ; C81.1@133.55,150.1 v1(135.4,150.1) ; 139.025,100.7 139.025,100.13 139.655,99.5 XP3.39@139.655,99.256 ; XP3.25@139.655,81.476 XP3.25@139.899,81.476 ; 141.125,82.35 140.773,82.35 XP3.25@139.899,81.476 ; 141.75,80.525 140.85,80.525 XP3.25@139.899,81.476 ; C80.1@155.1,150.1 v1(156.95,150.1) ; C78.1@194.075,154.05 v1(195.925,154.05)
  Bottom w1: 26.2,135.05 26.262,134.988 ; v1@26.262,133.638 v1(26.3,133.6) ; 28.4,133.6 28.5,133.7 ; C4.1@45.9,67.7 v1(45.9,70) ; C8.1@47.512,47.525 47.412,47.425 43.6,47.425 v1(43.5,47.525) 43.538,47.563 43.538,48.839 44.124,49.425 C6.1@47.512,49.425 ; C17.1@47.512,55.125 v1(50.4,55.125) ; C20.1@47.512,57.125 v1(50.4,57.125) ; C35.1@47.512,64.075 v1(47.512,65.625) ; C21.1@51.4,66.825 51.4,64.625 v1(52.1,63.925) ; C34.1@52.5,44.825 v1(52.5,46.913) C18.1@52.5,48.825 ; C31.1@56.2,44.825 v1(56.2,48.325) ; C36.1@56.75,72.825 v1(56.75,75.075) ; v1(56.8,63.925) C22.1@56.8,66.825 ; C41.1@60,44.825 v1(60,48.325) ; v1(60.9,63.925) C23.1@60.9,66.825 ; C77.1@62.505,144.5 v1(64.1,144.5) ; C33.1@62.8,46.025 C33.1@62.8,46.125 v1(62.8,48.325) ; C37.1@63.75,74.625 v1(66.4,74.625) ; v1(65.1,63.925) C9.1@65.1,66.825 ; C5.1@65.9,46.025 C5.1@65.9,46.125 v1(65.9,48.325) ; v1(66.95,54.025) C43.1@69.488,54.025 ; v1(66.95,57.725) C42.1@69.5,57.725 ; v1(66.95,63.925) 66.988,63.963 66.988,64.427 67.782,65.221 69.454,65.221 C7.1@69.5,65.175 ; v1(69.5,44.425) C32.1@69.5,47.825 ; C24.1@69.5,61.425 73.5,61.425 74.1,60.825 v1(74.1,59.125) ; C94.1@79,36.45 v1(80.8,36.45) ; DA4.1@79.806,23.2 81.264,23.2 81.85,23.786 v1(81.85,26.125) ; C59.-@80.5,32.919 80.557,32.862 82.638,32.862 v1(82.65,32.875) ; C79.1@83.305,144.634 v1(84.9,144.634) ; C12.1@85.15,110.6 v1(85.15,113.1) ; C14.1@85.19,94.816 v1(85.19,97.316) ; C3.1@85.2,127.575 v1(85.2,130.075) ; v1(91.625,39.225) C57.1@93.35,39.225 ; v1(95.75,27.025) C64.-@95.75,29.825 ; C56.1@100.925,45.875 103.146,45.875 103.696,46.425 v1(103.75,46.425) ; C95.+@100.925,52 v1(100.925,53.525) ; C55.1@100.95,35.225 v1(103.275,35.225) ; v1(103.825,28.725) C54.1@103.825,31.425 ; C45.1@105.8,53.375 v1(105.8,55.875) ; v1(107.425,40.7) C61.2@107.425,42.45 ; XP2.2@109.235,70.725 109.235,65.94 109.775,65.4 R11.1@110.825,65.4 ; C53.1@109.7,31.425 v1(109.7,33.575) ; C46.1@111.325,53.375 v1(111.325,55.95) ; C60.2@112.25,37.75 v1(114.4,37.75) ; C52.1@114.2,31.425 v1(114.2,33.55) ; v1(116.325,50.975) C47.1@116.325,53.375 ; v1(118.6,34.075) C51.1@118.6,36.05 ; v1(120,41.85) 120.013,41.838 122.913,41.838 C49.1@122.925,41.825 ; v1(120,46.55) C67.-@122.925,46.55 ; v1(120.625,38.15) C50.1@122.925,38.15 ; v1(121.975,28.75) C66.-@121.975,31.425 ; C48.1@125.4,52.1 125.438,52.138 125.438,53.912 v1(125.475,53.95) ; C62.-@127.475,56.775 v1(129.961,56.775) ; C76.1@134.005,129.7 v1(135.6,129.7) ; C73.1@150.38,129.725 v1(151.975,129.725) ; C70.1@195.275,133.775 v1(197.275,133.775) ; C71.1@212.275,133.875 v1(214.275,133.875)
  Bottom w3: pad.0@140,185 pad.0@5,185 5,20.575 14.832,10.743 14.832,5.168 pad.0@15,5 15.8,4.2 139.2,4.2 pad.0@140,5 140.825,4.175 264.175,4.175 pad.0@265,5 265,12.225 275,22.225 pad.0@275,185
  other v1: 217,24.5 240,24.5 253,41 253,64 253,87 178,97.7 155,98 201,98 212.975,110 253,110 235,133 253,133 244,147.55
IMPB+/-V: DD1.80 XP4.22 | length 241.5
  Top w0.25: DD1.80@69.488,50.575 69.513,50.6 82.275,50.6 v1(82.3,50.625)
  Top w0.5: XP4.22@32.9,172.068 32.9,151.125 51.5,132.525 51.5,115.2 49.8,113.5 49.8,101.4 15,66.6 15,43.975 24.25,34.725 v1(41.2,34.725)
  Bottom w0.5: v1(41.2,34.725) 53.2,34.725 57.325,38.85 70.525,38.85 v1(82.3,50.625)
IMPB_n: DA17.7 R45.1 XP4.24 | length 110
  Top w0.25: DA17.7@80.765,147.384 80.765,147.934 81.125,148.294 81.125,148.834 81.125,149.412 80.979,149.559 80.825,149.559 80.4,149.984 R45.1@80.4,150.384 80.4,150.784 80.825,151.209 81.009,151.209 81.125,151.325 81.125,151.679 81.067,151.737 81.067,151.933 v2(81,152)
  INT2, +3.3VB w0.2: XP4.24@30.9,172 30.9,171.648 30.3,171.048 30.3,169.675 29.949,169.324 28.426,167.801 28.075,167.45 15.249,167.45 12.325,164.526 12.325,157.275 17.3,152.3 20.3,149.3 80.5,149.3 81.1,149.9 81.1,151.9 v2(81,152)
IMPB_p: DA17.6 R45.2 XP4.25 | length 114.1
  Top w0.25: v2(81.8,152) 81.733,151.933 81.733,151.737 81.675,151.679 81.675,151.325 81.791,151.209 81.975,151.209 82.4,150.784 R45.2@82.4,150.384 82.4,149.984 81.975,149.559 81.821,149.559 81.675,149.412 81.675,149.061 81.675,148.294 82.035,147.934 DA17.6@82.035,147.384
  INT2, +3.3VB w0.2: XP4.25@28.9,174 29.7,173.2 29.7,172.145 29.7,169.924 27.826,168.05 15,168.05 11.725,164.775 11.725,157.026 16.664,152.088 20.051,148.7 80.749,148.7 81.7,149.651 81.7,151.9 v2(81.8,152)
IMPC_n: DA12.7 R33.1 XP10.10 | length 22.6
  INT1 w0.2: XP10.10@218.5,181 219.4,180.1 219.4,171.651 219.426,171.626 221.651,169.4 222.749,169.4 222.773,169.424 222.949,169.6 223.3,169.951 223.3,170.933 223.323,170.956 223.323,171.173 v2(223.4,171.25)
  Bottom w0.25: v2(223.4,171.25) 223.333,171.183 223.333,170.987 223.275,170.929 223.275,169.721 223.421,169.575 223.575,169.575 224,169.15 R33.1@224,168.75 224,168.35 223.575,167.925 223.421,167.925 223.275,167.779 223.275,167.2 223.275,166.66 223.635,166.3 DA12.7@223.635,165.75
IMPC_p: DA12.6 R33.2 XP10.11 | length 18.4
  INT1 w0.2: XP10.11@220.5,179 220.5,178.733 220,178.233 220,171.9 220.026,171.874 221.9,170 222.5,170 222.524,170.024 222.7,170.2 222.7,170.933 222.677,170.956 222.677,171.173 v2(222.6,171.25)
  Bottom w0.25: DA12.6@222.365,165.75 222.365,166.3 222.725,166.66 222.725,167.427 222.725,167.779 222.579,167.925 222.425,167.925 222,168.35 R33.2@222,168.75 222,169.15 222.425,169.575 222.579,169.575 222.725,169.721 222.725,170.929 222.667,170.987 222.667,171.183 v2(222.6,171.25)
KA: R53.1 XP3.11 | length 19.2
  Bottom w0.5: XP3.11@139.655,63.696 156.325,63.696 R53.1@158.875,63.696
KB: R54.1 XP3.13 | length 16.9
  Bottom w0.5: XP3.13@139.655,66.236 153.036,66.236 153.775,66.975 R54.1@153.775,69.4
KN_START: R58.2 XP3.15 | length 3.4
  Bottom w0.5: XP3.15@139.63,68.778 R58.2@143,68.778
KN_STOP: R59.2 XP3.33 | length 3.8
  Bottom w0.5: XP3.33@139.63,91.638 139.955,91.638 140.917,92.6 R59.2@143,92.6
LIMIT: DD1.138 XP4.28 XP5.28 XP7.20 XP10.13 | length 631.4
  Top w0.25: 50.4,70.468 52.75,68.118 DD1.138@52.75,66.813
  Top w0.5: v1(7.65,71.95) v1(15.3,71.95) ; v1(26.773,71.95) 26.798,71.975 48.893,71.975 50.4,70.468 ; XP10.13@222.5,179 222.5,177.7 225.35,174.85 v1(232.7,174.85)
  Bottom w0.5: v1(7.65,71.95) 7.65,91.175 19.2,102.725 19.2,114.95 8.175,125.975 8.175,168.4 ; v1(15.3,71.95) 51.1,107.75 51.1,112.4 52.1,113.4 53.5,113.4 55.2,111.7 55.2,100.377 v1(26.773,71.95) ; XP4.28@26.9,172 25.15,170.25 10.025,170.25 8.175,168.4 ; XP5.28@66.5,159 71.9,153.6 92.5,153.6 95.8,156.9 95.8,163.7 91.45,168.05 ; 78.865,168.135 76.5,170.5 76.5,177.5 80.9,181.9 ; 78.9,168.1 91.45,168.1 107.9,168.1 XP7.20@111.8,172 ; v1@232.7,174.863 232.7,182 227.4,187.3 153.125,187.3 144.95,179.125 135.125,179.125 132.35,181.9 80.9,181.9 ; 8.175,168.4 8.175,173.9 16.175,181.9 80.9,181.9
LINE: DA19.1 DD1.119 | length 116.4
  Top w0.25: DD1.119@62.25,66.813 62.25,72.8 63.25,73.8
  Top w0.5: 63.25,73.8 69.825,80.375 83.075,80.375 103,100.3 103,118 129.745,144.745 DA19.1@129.745,147.45
LINE_n: DA19.7 R46.2 R47.1 XP7.13 | length 34.5
  Top w0.25: DA19.7@131.015,152.95 131.175,153.11 131.175,154.16 131.325,154.31 131.325,155.979 131.179,156.125 131.025,156.125 130.6,156.55 R47.1@130.6,156.95 130.6,157.35 131.275,158.025 131.275,158.525 131.275,159.325 130.55,160.05 R46.2@130.55,160.35 130.55,160.65 131.275,161.375 131.275,161.987 131.275,163.45 131.217,163.508 131.217,164.016 v2(131.15,164.083)
  INT1 w0.2: XP7.13@117.8,174 117.8,173.919 116.7,172.819 116.7,170.767 116.865,170.601 118.058,169.409 127.459,169.409 131.25,165.618 131.25,164.4 131.227,164.377 131.227,164.16 v2(131.15,164.083)
LINE_p: DA19.6 R47.2 R49.1 XP7.14 | length 32.4
  Top w0.25: v2(131.95,164.083) 131.883,164.016 131.883,163.508 131.825,163.45 131.825,162.215 131.825,161.375 132.55,160.65 R49.1@132.55,160.35 132.55,160.05 131.825,159.325 131.825,158.753 131.825,158.125 132.6,157.35 R47.2@132.6,156.95 132.6,156.55 132.175,156.125 132.021,156.125 131.875,155.979 131.875,154.538 131.875,154.275 132.052,154.098 132.052,153.183 DA19.6@132.285,152.95
  INT1 w0.2: XP7.14@117.8,172 117.8,171.733 117.3,171.233 117.3,171.015 118.307,170.009 127.708,170.009 131.85,165.866 131.85,164.4 131.873,164.377 131.873,164.16 v2(131.95,164.083)
Meas: DD4.97 XP15.3 | length 159.7
  Top w0.25: v1(48.19,7.65) 48.215,7.65 50.215,5.65 127.275,5.65 139.375,17.75 139.375,35.275 129,45.65 DD4.97@122.9,45.65
  Bottom w0.25: XP15.3@25.92,12.85 31.12,7.65 v1(48.19,7.65)
N_CONF: DD1.14 R8.1 | length 9.2
  Top w0.25: R8.1@39.3,60.525 41.05,60.525 43.5,58.075 DD1.14@47.512,58.075
NCS: DD1.8 DD3.1 | length 15.9
  Top w0.25: DD3.1@35.705,65.175 35.705,66.654 ; 35.705,66.354 36.276,66.925 39.25,66.925 45.1,61.075 DD1.8@47.512,61.075
NetC1_2: C1.2 C2.+ DD2.4 L8.2 | length 23.9
  Top w0.5: DD2.4@27.025,41.925 27.025,40 28.75,38.275 31.899,38.275 ; C1.2@31.899,42.049 31.899,38.275 ; C2.+@36.199,41.099 36.297,41 36.297,38.275 ; L8.2@39.4,41.122 39.4,39.325 38.35,38.275 36.297,38.275 ; 31.899,38.275 36.297,38.275
NetC10_2: C10.2 C11.+ DA2.2 DA2.4 L6.1 | length 38.8
  Top w1: L6.1@68.2,126.075 C10.2@71.8,126.075 71.8,122.875 73.5,121.175 76.1,121.175 ; C11.+@76.1,125.025 76.1,121.175 ; DA2.2@82.3,125.875 80.236,125.875 79.65,125.289 79.65,121.175 ; DA2.4@88.1,125.875 88.1,122.175 87.1,121.175 79.65,121.175 ; 76.1,121.175 79.65,121.175
NetC25_2: C25.2 C26.+ DA1.2 DA1.4 L2.1 | length 38.8
  Top w1: L2.1@68.19,93.316 C25.2@71.79,93.316 71.79,90.116 73.49,88.416 76.09,88.416 ; C26.+@76.09,92.266 76.09,88.416 ; DA1.2@82.29,93.116 80.226,93.116 79.64,92.53 79.64,88.416 ; DA1.4@88.09,93.116 88.09,89.416 87.09,88.416 79.64,88.416 ; 76.09,88.416 79.64,88.416
NetC27_2: C27.2 C28.+ DA3.2 DA3.4 L7.1 | length 38.8
  Top w1: L7.1@68.15,109.1 C27.2@71.75,109.1 71.75,105.9 73.45,104.2 76.05,104.2 ; C28.+@76.05,108.05 76.05,104.2 ; 79.6,104.2 79.6,108.314 80.186,108.9 DA3.2@82.25,108.9 ; DA3.4@88.05,108.9 88.05,105.2 87.05,104.2 76.05,104.2
NetC59_+: C59.+ C94.2 DA4.2 DA4.4 L9.1 L10.1 | length 48.7
  Bottom w0.5: C94.2@77,36.45 74.4,36.45 ; DA4.4@77.481,29.025 73.7,29.025 ; DA4.2@77.506,23.2 77.506,21.581 77.05,21.125 74.65,21.125 73.7,22.075 73.7,29.025 ; C59.+@77.531,32.85 74.4,32.85 ; L9.1@85.475,32.8 85.468,32.807 84.418,32.807 83.8,33.425 83.8,35.41 ; L10.1@85.475,35.35 83.86,35.35 83.8,35.41 ; 73.7,29.025 73.7,32.15 74.4,32.85 ; 74.4,32.85 74.4,36.45 ; 74.4,36.45 76.65,38.7 82.495,38.7 83.8,37.395 83.8,35.41